# Altium PCB Module_BuckMini_MP2315GJ_5V.PcbDoc
Units mm, origin at the board's own origin, x right, y up, seen from the top; angles counter-clockwise.
Board outline 14.35 x 10.52 mm, 2 copper layers (Top Layer, Bottom Layer); 17 components, 10 nets, 37 pads, 15 vias.
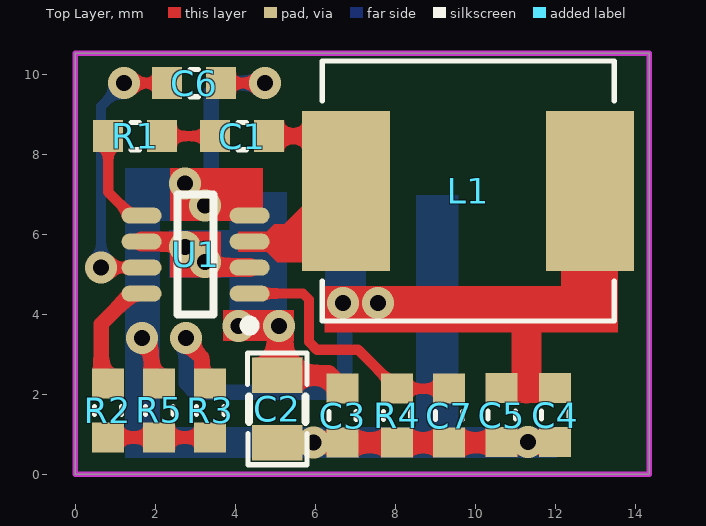
[diagram p0: Top Layer view]
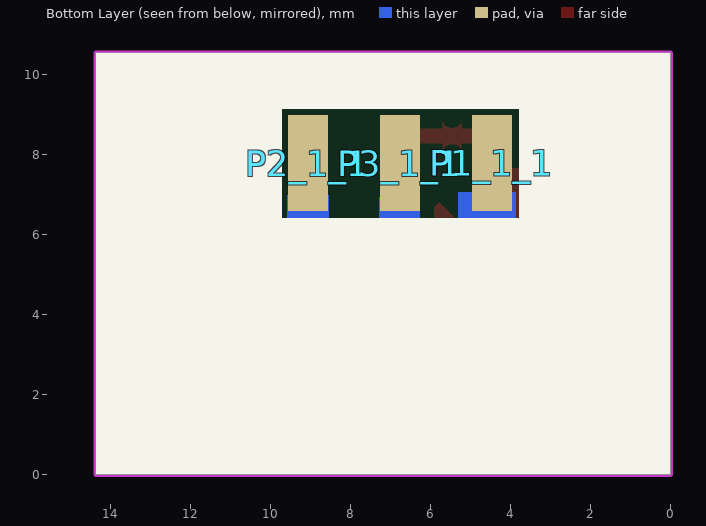
[diagram p1: Bottom Layer view, seen from below]
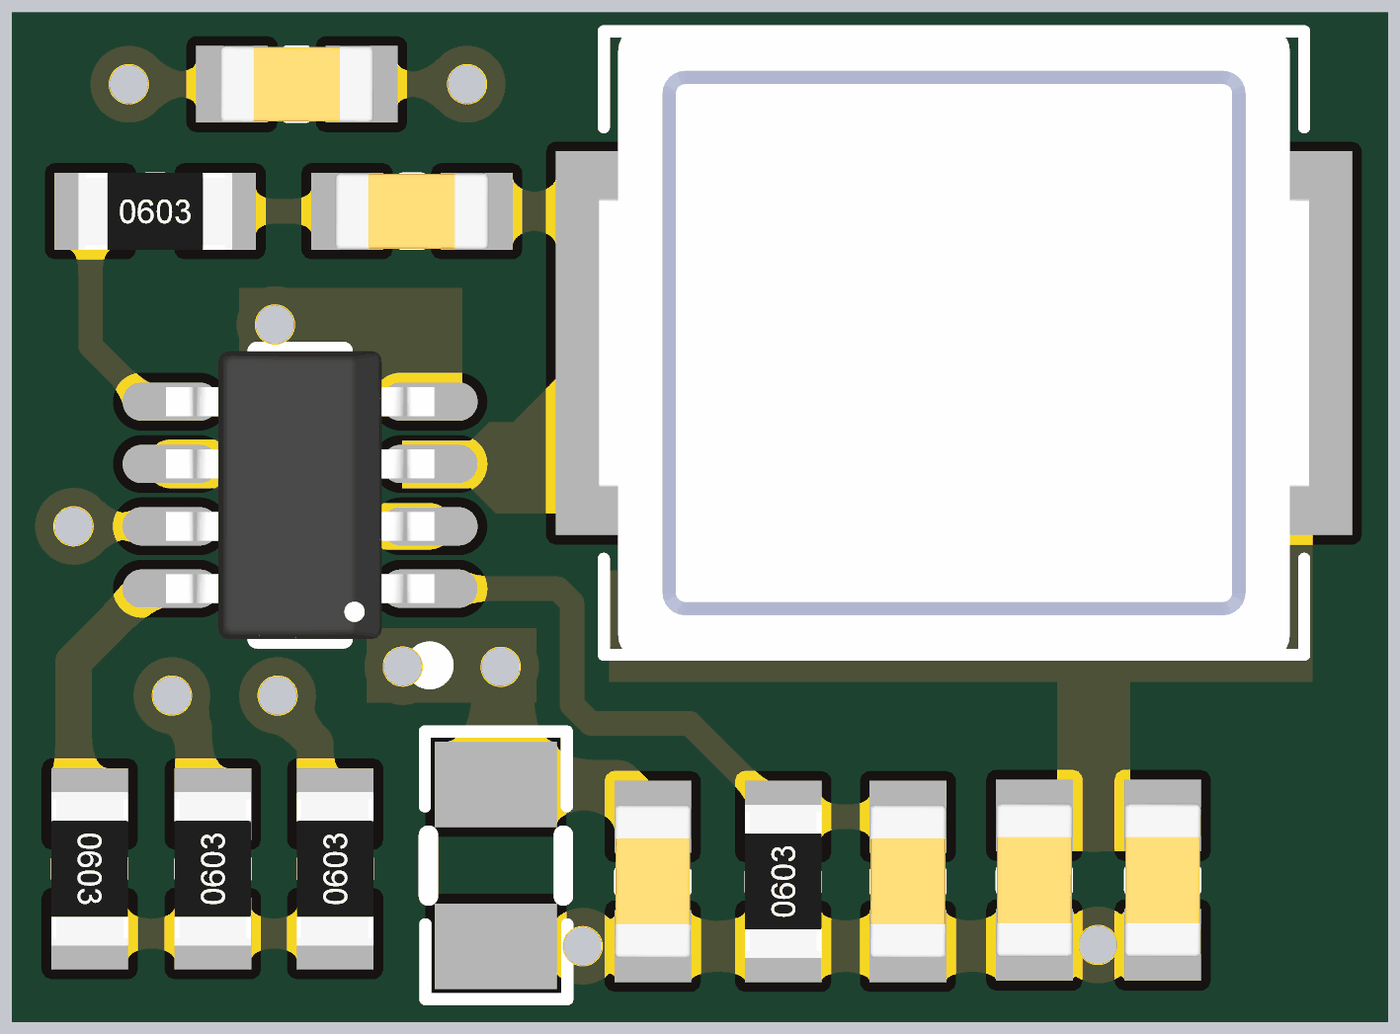
[diagram p2: 3D render of the assembled board from above, using the file's embedded part models]

## Layer stack, top to bottom
Top Solder: solder mask 0.0102, Solder Resist, Dk 3.5
Top Layer: signal copper 0.0356
Dielectric 1: dielectric 0.32, FR-4, Dk 4.8
Bottom Layer: signal copper 0.0356
Bottom Solder: solder mask 0.0102, Solder Resist, Dk 3.5

## Board outline
0,0 14.35,0 14.35,10.525 0,10.525

## Design rules (kind name [scope] priority, off if disabled: settings)
Clearance Clearance_U1 [InComponent('U1')] p1: gap=0.102 ignorepadtopadclearanceinfootprint=FALSE
Clearance [All] p2: gap=0.203 ignorepadtopadclearanceinfootprint=FALSE
HoleToHoleClearance [All] p1: gap=0 allowstackedmicrovias=TRUE
MinimumSolderMaskSliver [All] p1: minsoldermaskwidth=0
PlaneConnect [All] p1: planeconnectstyle=Direct reliefexpansion=0.508 reliefentries=4 reliefconductorwidth=0.254 reliefairgap=0.254
PolygonConnect [All] p1: connectstyle=Direct reliefconductorwidth=0.254 reliefentries=4 polygonreliefangle="90 Angle" airgapwidth=0.254
RoutingVias [All] p1: holewidth=0.711 width=1.27 viastyle="Through Hole" minholewidth=0.711 minwidth=1.27 maxholewidth=0.711 maxwidth=1.27
SilkToSilkClearance [All] p1: silktosilkclearance=0
SilkToSolderMaskClearance [IsText] p1: minsilkscreentomaskgap=0 clearancetoexposedcopper=TRUE
SolderMaskExpansion [All] p1: expansion=0.102 istentingtop=FALSE
Width [All] p1: maxlimit=1.27 minlimit=0.254 preferedwidth=0.635
25 further rules are at their usual default settings.

## Classes and differential pairs
component class Module_BuckMini_MP2315GJ_5V: C1 C6 L1 R1 R2

## Components (designator, comment, footprint, x,y, rotation, side; value= is the part's Value field where it differs from the comment)
C1 "100nF_0603" CN-SMD-0603 4.175,8.453 r0 top
C2 "22uF_1210" cap_SMD_0805 5.04,1.653 r90 top
C3 "22uF_0603" CN-SMD-0603 6.685,1.465 r90 top
C4 "22uF_0603" CN-SMD-0603 12,1.478 r90 top
C5 "22uF_0603" CN-SMD-0603 10.663,1.478 r90 top
C6 "100nF_0603" CN-SMD-0603 2.975,9.778 r180 top
C7 "10nF_0603" CN-SMD-0603 9.345,1.465 r90 top
L1 "10uH/4A_0630" INDUCTOR_0630 9.825,7.079 r0 top
P1_1_1 "Pad - MKB" "Pad  - MKB 2x2.5 (mm)" 4.461,7.778 r180 bottom
P2_1_1 "Pad - MKB" "Pad  - MKB 2x2.5 (mm)" 9.061,7.778 r180 bottom
P3_1_1 "Pad - MKB" "Pad  - MKB 2x2.5 (mm)" 6.761,7.778 r180 bottom
R1 "20R_0603" RES-SMD-0603 1.5,8.453 r0 top
R2 "20K_0603" RES-SMD-0603 0.817,1.597 r270 top
R3 "15K_0603" RES-SMD-0603 3.375,1.597 r90 top
R4 "75K_0603" RES-SMD-0603 8.045,1.465 r90 top
R5 "3K_0603" RES-SMD-0603 2.1,1.597 r90 top
U1 "MP2315GJ" TSOT-8 3.01,5.493 r180 top

## Footprints (in the part's own frame and the unit in brackets; to place one, negate y for a bottom-side part, rotate by r counter-clockwise, add the part's x,y. Pads: shape width x height; smd on the part's side, far side on the other; paste and mask are expansions set on the pad)
cap_SMD_0805 [mm]
  rect 0.889x1.27 smd: 1(-0.863,-0.01) 2(0.823,-0.01)
  silkscreen extent -1.42,-0.76 1.37,0.73, body extent -1.02,-0.63 0.98,0.62, height 0.78
CN-SMD-0603 [mm]
  rect 0.75x0.8 smd: 1(-0.675,0) 2(0.675,0)
  silkscreen extent -0.1,-0.34 0.1,0.34, body extent -0.8,-0.4 0.8,0.4, height 0.85
INDUCTOR_0630 [mm]
  rect 2.2x4 smd: 1(-3.05,-0.001) 2(3.049,-0.001)
  silkscreen extent -3.65,-3.25 3.65,3.25, body extent -3.7,-3.3 3.7,3.3, height 3.05
"Pad  - MKB 2x2.5 (mm)" [mm]
  rect 1x2.4 smd: 0(0,0)
RES-SMD-0603 [mm]
  rect 0.75x0.8 smd: 1(-0.675,0) 2(0.675,0)
  silkscreen extent -0.1,-0.34 0.1,0.34, body extent -0.8,-0.4 0.8,0.4, height 0.43
TSOT-8 [mm] "TSOT, 8-Leads, Body 2.90x1.60mm, Pitch 0.65mm, IPC Medium Density"
  oval 1x0.4 smd: 1(-1.35,0.975) 2(-1.35,0.325) 3(-1.35,-0.325) 4(-1.35,-0.975) 5(1.35,-0.975) 6(1.35,-0.325) 7(1.35,0.325) 8(1.35,0.975)
  silkscreen extent -1.48,-1.5 0.45,1.9, body extent -1.4,-1.5 1.4,1.5, height 1

## Part data
C1 C6: library part "CAP 0603 104", "Cap SMD, 0.06x0.03 inch, 1.55x0.85 mm - 1608"
C2 C5: library part "CAP 1210 226", "Cap SMD, 0.12x0.1 inch, 3.2x2.6 mm - 3225"
C3 C4: library part "CAP 0603 226", "Cap SMD, 0.06x0.03 inch, 1.55x0.85 mm - 1608"
C7: library part "CAP 0603 103", "Cap SMD, 0.06x0.03 inch, 1.55x0.85 mm - 1608"
L1: library part "0630 100", "Inductor"
R1: library part "RES 0603 20R", "Resistor SMD, 0.06x0.03 inch, 1.55x0.85 mm - 1608, 1/10W"
R2: library part "RES 0603 20K", "Resistor SMD, 0.06x0.03 inch, 1.55x0.85 mm - 1608, 1/10W"
R3: library part "RES 0603 15K", "Resistor SMD, 0.06x0.03 inch, 1.55x0.85 mm - 1608, 1/10W"
R4: library part "RES 0603 75K", "Resistor SMD, 0.06x0.03 inch, 1.55x0.85 mm - 1608, 1/10W"
R5: library part "RES 0603 3K", "Resistor SMD, 0.06x0.03 inch, 1.55x0.85 mm - 1608, 1/10W"
U1: "High Efficiency 3A, 24V, 500kHz /  Synchronous Step Down Converter"

## Via types
v1: diameter 0.8, hole 0.4, Top Layer to Bottom Layer, tented both sides, 15 vias

## Nets (pads, with @x,y where several pads share a name; then routed paths per layer and width w, separated by ;. In a path a pad name is that pad's centre, name@x,y a point inside that pad or via, vN(x,y) a via of type N, cw(c..) or ccw(c..) an arc to the next point about the centre after c; other vN are vias at no path point)
GND: C2.1 C3.1 C4.1 C5.1 C6.1 C7.1 P2_1_1.0 R4.1 R5.2 U1.4 | length 25.6
  Top Layer w0.254: C6.1 v1(4.75,9.778) ; 4.211,7.421 4.36,7.273 U1.4
  Top Layer w0.381: v1@1.599,3.375 1.9,3.073 1.9,2.456 2.085,2.272 R5.2
  Top Layer w0.508: C2.1@5.225,0.79 v1(5.955,0.79) C3.1 C4.1@12.045,0.79
  Bottom Layer w0.381: 2.109,7.396 2.012,7.396 1.599,6.983 1.599,3.403 1.599,1.204 2.05,0.753 5.475,0.753 ; 2.232,7.169 2.537,7.169 v1@2.736,7.369 ; v1(2.748,7.271) 3.209,7.271 3.4,7.462 3.4,9.555 3.623,9.778 v1(4.75,9.778)
  other v1: 11.325,0.803 1.674,3.403 3.245,6.721
NetC1_1: C1.1 R1.2 | length 1.3
  Top Layer w0.254: R1.2 C1.1
NetC1_2: C1.2 L1.1 U1.3 | length 5.1
  Top Layer w0.381: U1.3 6.091,5.818 6.091,5.938 6.7,6.548 6.7,6.778 L1.1@7,7.078 ; C1.2 L1.1@6.6,8.453
NetC6_2: C6.2 U1.7 | length 7.1
  Top Layer w0.254: v1(0.648,5.168) U1.7 ; v1(1.225,9.778) C6.2
  Bottom Layer w0.254: v1(0.648,5.168) 0.648,9.2 v1@1.305,9.858
NetC7_2: C7.2 R4.2 U1.1 | length 6.6
  Top Layer w0.254: U1.1 5.694,4.518 5.843,4.369 5.843,3.309 6.04,3.113 7.072,3.113 7.772,2.413 7.772,2.388 8.02,2.14 C7.2
NetR1_1: R1.1 U1.5 | length 2.5
  Top Layer w0.254: R1.1 0.825,7.053 1.41,6.468 U1.5
NetR2_1: R2.1 U1.8 | length 2.5
  Top Layer w0.381: R2.1@0.649,2.63 0.649,3.757 1.41,4.518 U1.8
NetR2_2: R2.2 R3.1 R5.1 | length 2.6
  Top Layer w0.305: R2.2 R5.1 R3.1
V_VIN: C2.2 C3.2 P1_1_1.0 U1.2 U1.6 | length 5.5
  Top Layer w0.483: v1@3.335,5.168 U1.2
  Top Layer w0.508: U1.6 2.629,5.818 2.758,5.688 v1@2.758,5.434 ; v1@2.904,5.58 v1@2.922,5.58 ; C2.2 C2.2@5.241,2.476 ; v1@5.1,3.753 v1@5.121,3.732 ; C2.2@5.431,2.666 C2.2@5.241,2.476 ; C3.2 6.66,2.14 6.324,2.476 C2.2@5.241,2.476
  Top Layer w0.635: C2.2@5.121,2.657 v1@5.121,3.632
  other v1: 5.1,3.703 4.08,3.705 3.245,5.311 2.748,5.686
V_VOUT: C4.2 C5.2 L1.2 P3_1_1.0 R3.2 | length 11.5
  Top Layer w0.381: v1(2.775,3.403) 2.775,3.3 3.166,2.909 3.166,2.456 3.35,2.272 R3.2
  Top Layer w0.635: 11.25,4.353 11.281,4.321 ; 11.281,2.153 C4.2@11.9,2.153
  Top Layer w0.762: 11.281,2.153 11.281,4.321
  Bottom Layer w0.381: v1(2.775,3.403) 2.775,2.271 2.998,2.047 6.516,2.047 6.739,2.271 6.739,4.239 v1(6.7,4.278)
  other v1: 7.575,4.278

## Keep-outs
Keep-Out Layer:
  the board outline again, w0.127

## Other copper
Top Layer:
  rectangle net V_VOUT: 10.425,1.778 12.2,2.453
  rectangle net V_VOUT: 12.142,3.796 13.563,8.453
  rectangle net V_VIN: 3.7,3.328 5.475,4.106
  rectangle net V_VIN: 2.375,4.921 3.645,6.072
  rectangle net GND: 2.375,6.328 4.7,7.653
  rectangle net V_VOUT: 6.229,3.543 13.563,4.711
  region net NetC1_2: 4.075,6.063 4.786,6.063 4.975,6.253 5.225,6.253 5.775,6.803 5.9,6.678 5.9,5.378 5.825,5.303 5.051,5.303 4.79,5.564 4.075,5.564
Bottom Layer:
  rectangle net GND: 1.25,0.403 4.75,1.178
  rectangle net GND: 1.25,0.403 2.125,7.653
  rectangle net GND: 8.525,0.503 9.578,6.978
  rectangle net GND: 4.75,0.403 12.05,1.178
  rectangle net V_VIN: 2.35,4.903 5.3,6.103
  rectangle net V_VOUT: 6.225,3.853 7.975,4.703
  rectangle net GND: 1.25,6.328 3.65,7.653
  rectangle net V_VOUT: 6.25,3.878 7.275,6.928
  rectangle net V_VIN: 3.86,3.328 5.3,7.053

## Silkscreen, mask and mechanical layers (free items; w line width, h text height)
Bottom Overlay:
  region: 3.775,10.525 0,10.525 0,5.65 3.775,5.65
  rectangle: 9.7,5.65 14.35,10.525
  rectangle: 0,9.135 14.35,10.525
  rectangle: 0,0 14.35,6.4